# EAGLE board LCD-OLinuXino-15.6FHD (EAGLE 7.2.0)
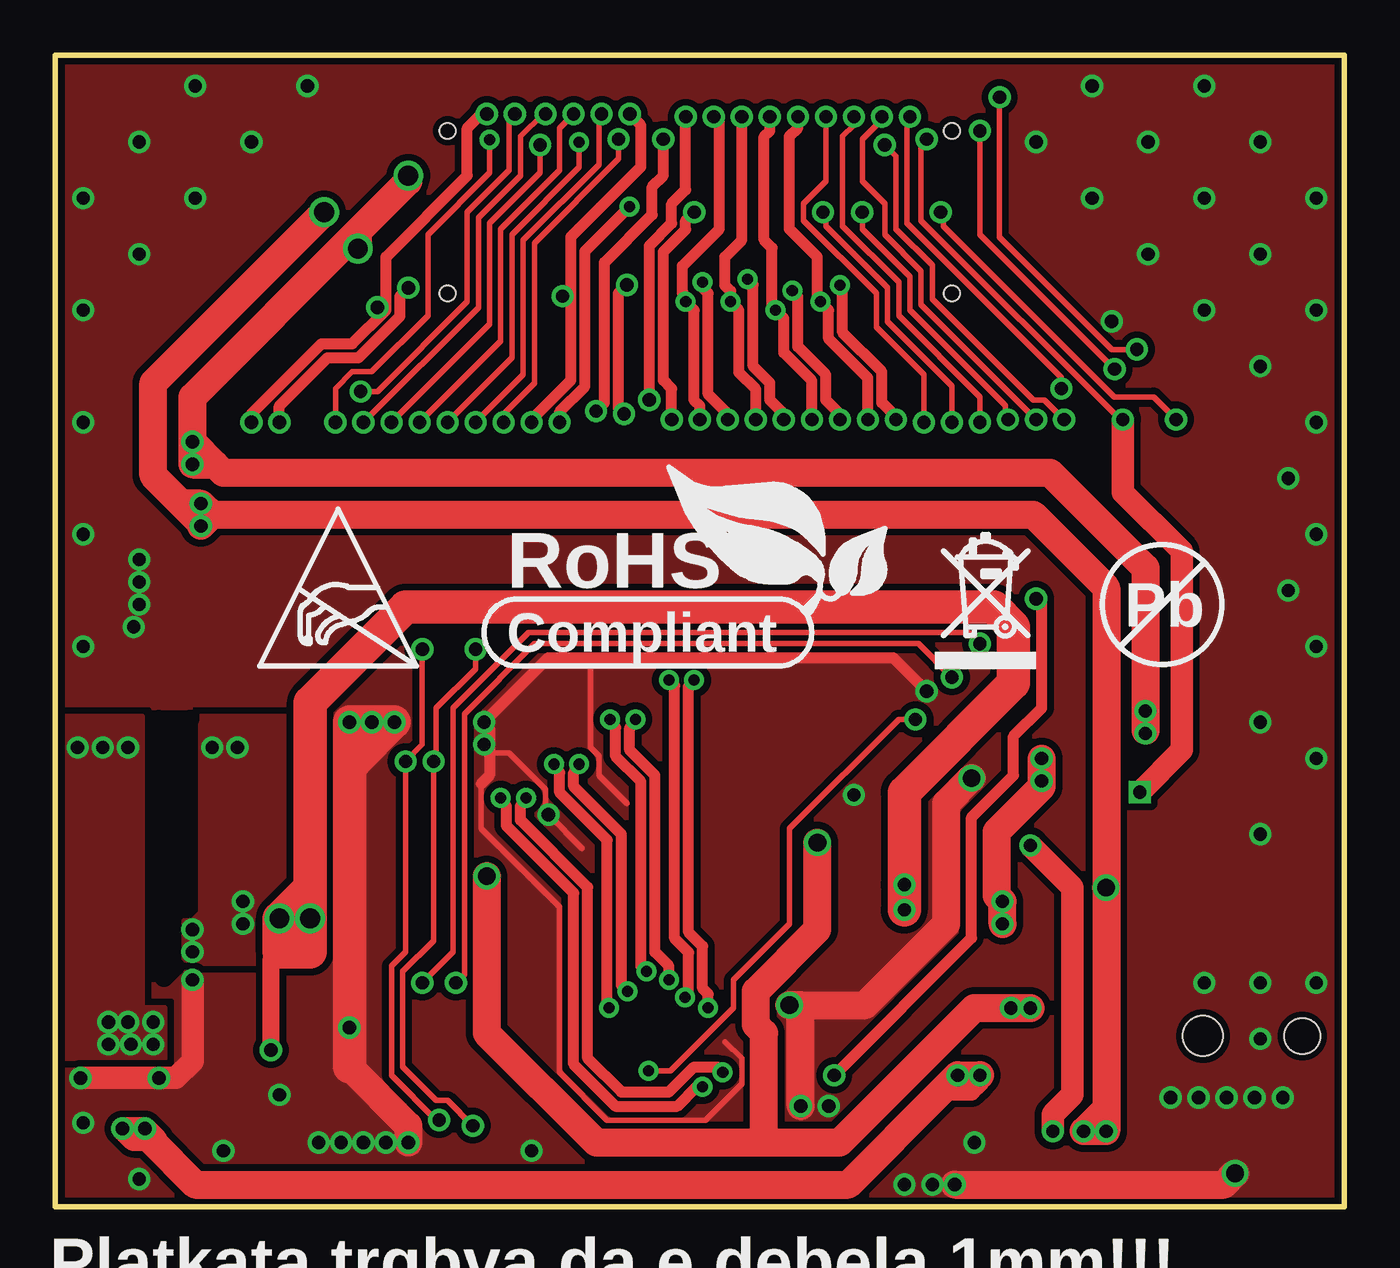
[diagram p0: board, top side]
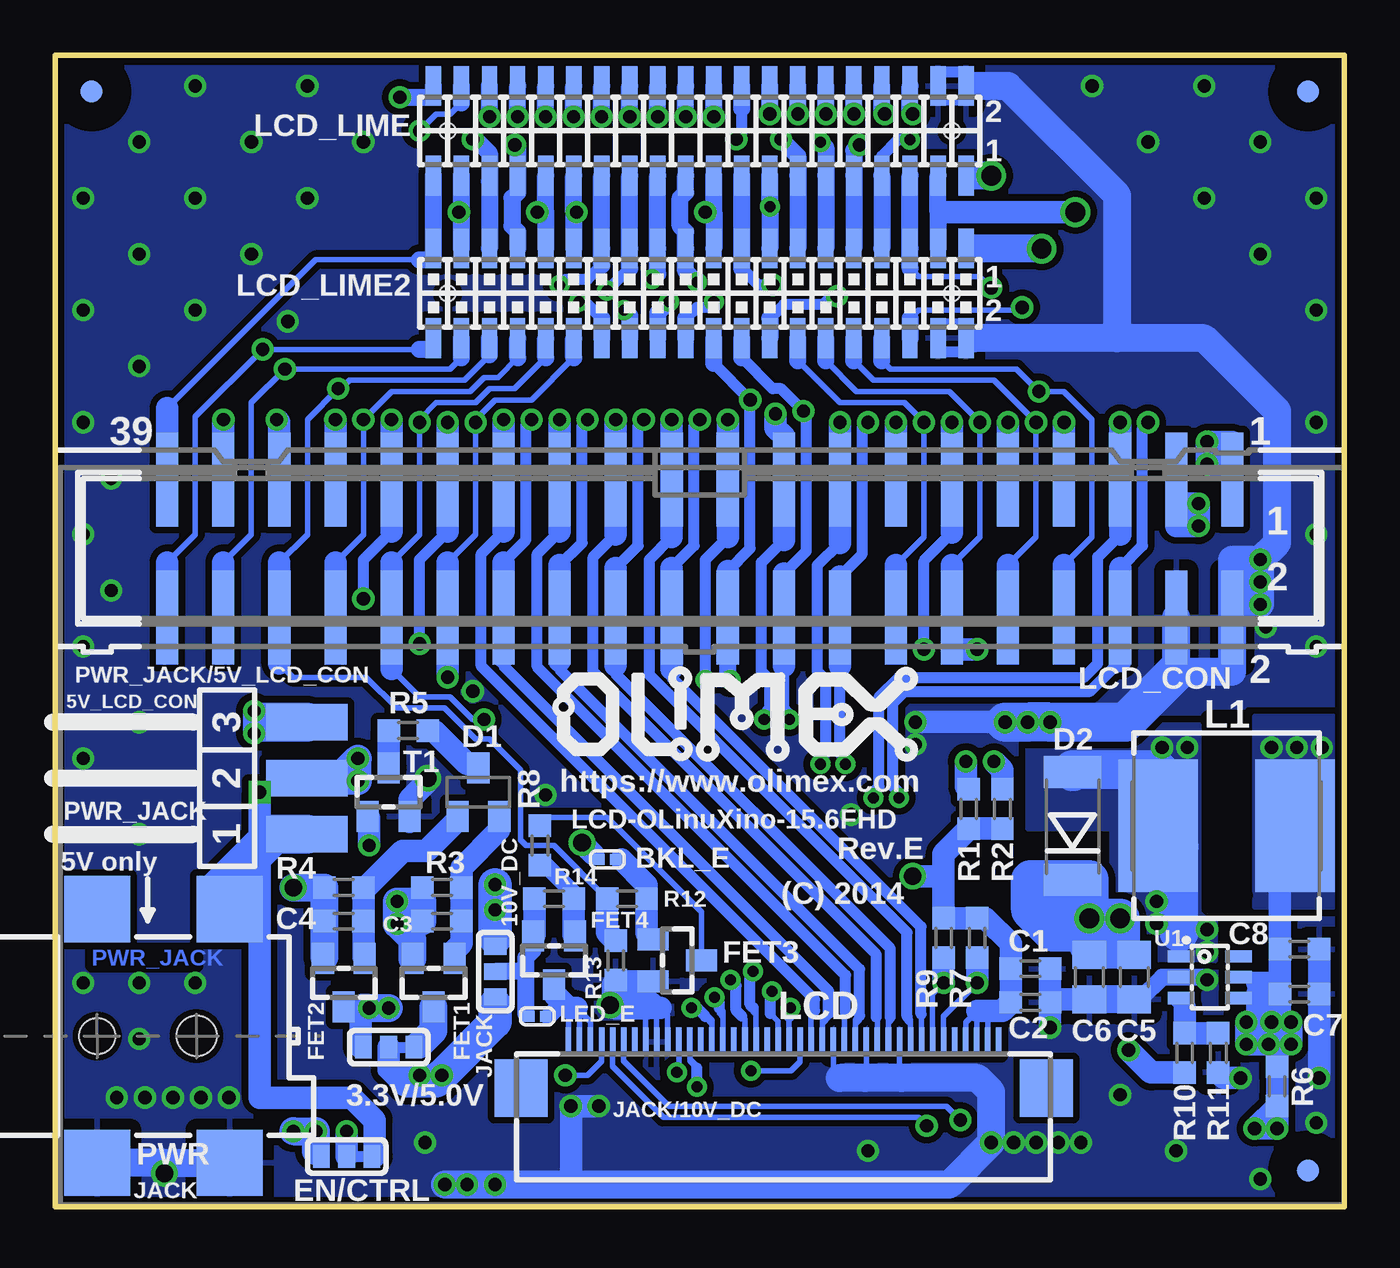
[diagram p1: board, bottom side, seen from below]

Size 58.42 x 52.2 mm. Coordinates in mm from the lower left corner, seen from the top.
Outline: 0,52.2 0,0 58.42,0 58.42,52.2 0,52.2
Copper layers (1+16): Top 0.035mm / dielectric 1mm / Bottom 0.035mm
Design rules "default": minimum track width 9.5mil, minimum drill 0.5mm, track to track 5mil, track to pad 5mil, pad to pad 5mil, via to via 5mil, smd to smd 1mil, copper to edge 10mil, drill to drill 8mil, minimum pad ring 8mil, minimum via ring 8mil, stop-mask expansion 4mil, vias tented up to drill 40mil, thermal gap 20mil
Net classes: 1 pwr: width 0.254 mm, drill 0.254 mm, clearance 0.241 mm
tRestrict: 3 lines
bRestrict: 2 lines

## Footprints (pad centres in the part's own frame; a part is rotated, then mirrored left to right if it is on the bottom)
SJ_2_SMALL_23_TIED = smd 0.762 x 1.016: 1 -1.143,0; 2 0,0; 3 1.143,0
SJ_1_THE_SMALLEST = smd 0.508 x 0.508: 1 -0.381,0; 2 0.381,0
C0603_DWS = smd 1.016 x 1.016: 1 -0.889,0; 2 0.889,0
C0805_5MIL_DWS = smd 1.27 x 1.524: 1 -1.016,0; 2 1.016,0
SOT23C = smd 1.4 x 1: 1 1.1,-0.95; 2 1.1,0.95; 3 -1.1,0
MELF-MLL41 = smd 1.45 x 2.6: 1 -2.445,0; 2 2.445,0
SOT23 = smd 1.4 x 1: 1 1.1,-0.95; 2 1.1,0.95; 3 -1.1,0
SJ_2_SMALL = smd 0.762 x 1.016: 1 -1.143,0; 2 0,0; 3 1.143,0
8X8MM_3131 = smd 3.6 x 6: 1 -3.1,0; 2 3.1,0
LCD_15.6'' = smd 0.25 x 1.3 bottom: 1 -67.54,31.89; 2 -67.04,31.89; 3 -66.54,31.89; 4 -66.04,31.89; 5 -65.54,31.89; 6 -65.04,31.89; 7 -64.54,31.89; 8 -64.04,31.89; 9 -63.54,31.89; 10 -63.04,31.89; 11 -62.54,31.89; 12 -62.04,31.89; 13 -61.54,31.89; 14 -61.04,31.89; 15 -60.54,31.89; 16 -60.04,31.89; 17 -59.54,31.89; 18 -59.04,31.89; 19 -58.54,31.89; 20 -58.04,31.89; 21 -57.54,31.89; 22 -57.04,31.89; 23 -56.54,31.89; 24 -56.04,31.89; 25 -55.54,31.89; 26 -55.04,31.89; 27 -54.54,31.89; 28 -54.04,31.89; 29 -53.54,31.89; 30 -53.04,31.89; 31 -52.54,31.89; 32 -52.04,31.89; 33 -51.54,31.89; 34 -51.04,31.89; 35 -50.54,31.89; 36 -50.04,31.89; 37 -49.54,31.89; 38 -49.04,31.89; 39 -48.54,31.89; 40 -48.04,31.89 | smd 2.4 x 2.6 bottom: P1 -69.69,29.79; P2 -45.89,29.79
ML40-MALE(GBH-254-SMT-40) = smd 1 x 4.25: 1 -24.13,-3.125; 2 -24.13,3.125; 3 -21.59,-3.125; 4 -21.59,3.125; 5 -19.05,-3.125; 6 -19.05,3.125; 7 -16.51,-3.125; 8 -16.51,3.125; 9 -13.97,-3.125; 10 -13.97,3.125; 11 -11.43,-3.125; 12 -11.43,3.125; 13 -8.89,-3.125; 14 -8.89,3.125; 15 -6.35,-3.125; 16 -6.35,3.125; 17 -3.81,-3.125; 18 -3.81,3.125; 19 -1.27,-3.125; 20 -1.27,3.125; 21 1.27,-3.125; 22 1.27,3.125; 23 3.81,-3.125; 24 3.81,3.125; 25 6.35,-3.125; 26 6.35,3.125; 27 8.89,-3.125; 28 8.89,3.125; 29 11.43,-3.125; 30 11.43,3.125; 31 13.97,-3.125; 32 13.97,3.125; 33 16.51,-3.125; 34 16.51,3.125; 35 19.05,-3.125; 36 19.05,3.125; 37 21.59,-3.125; 38 21.59,3.125; 39 24.13,-3.125; 40 24.13,3.125
YA-V36P-2X20-LF = smd 0.7 x 1.8: 1 -12.065,2.032; 2 -12.065,-2.032; 3 -10.795,2.032; 4 -10.795,-2.032; 5 -9.525,2.032; 6 -9.525,-2.032; 7 -8.255,2.032; 8 -8.255,-2.032; 9 -6.985,2.032; 10 -6.985,-2.032; 11 -5.715,2.032; 12 -5.715,-2.032; 13 -4.445,2.032; 14 -4.445,-2.032; 15 -3.175,2.032; 16 -3.175,-2.032; 17 -1.905,2.032; 18 -1.905,-2.032; 19 -0.635,2.032; 20 -0.635,-2.032; 21 0.635,2.032; 22 0.635,-2.032; 23 1.905,2.032; 24 1.905,-2.032; 25 3.175,2.032; 26 3.175,-2.032; 27 4.445,2.032; 28 4.445,-2.032; 29 5.715,2.032; 30 5.715,-2.032; 31 6.985,2.032; 32 6.985,-2.032; 33 8.255,2.032; 34 8.255,-2.032; 35 9.525,2.032; 36 9.525,-2.032; 37 10.795,2.032; 38 10.795,-2.032; 39 12.065,2.032; 40 12.065,-2.032 | hole 0.7: -11.43,0; 11.43,0
GPH127SMT-02X20(PA-V16X-2X20-LF) = smd 0.7 x 1.8: 1 -12.065,-2.032; 2 -12.065,2.032; 3 -10.795,-2.032; 4 -10.795,2.032; 5 -9.525,-2.032; 6 -9.525,2.032; 7 -8.255,-2.032; 8 -8.255,2.032; 9 -6.985,-2.032; 10 -6.985,2.032; 11 -5.715,-2.032; 12 -5.715,2.032; 13 -4.445,-2.032; 14 -4.445,2.032; 15 -3.175,-2.032; 16 -3.175,2.032; 17 -1.905,-2.032; 18 -1.905,2.032; 19 -0.635,-2.032; 20 -0.635,2.032; 21 0.635,-2.032; 22 0.635,2.032; 23 1.905,-2.032; 24 1.905,2.032; 25 3.175,-2.032; 26 3.175,2.032; 27 4.445,-2.032; 28 4.445,2.032; 29 5.715,-2.032; 30 5.715,2.032; 31 6.985,-2.032; 32 6.985,2.032; 33 8.255,-2.032; 34 8.255,2.032; 35 9.525,-2.032; 36 9.525,2.032; 37 10.795,-2.032; 38 10.795,2.032; 39 12.065,-2.032; 40 12.065,2.032 | hole 0.7: -11.43,0; 11.43,0
PWR-JACK-SMD = smd 3 x 3: 1 6,5.75; 2 0,-5.75; 3 6,-5.75; 4 0,5.75 | hole 1.6: 0,0 | hole 1.8: 4.5,0
HN1X3-SMD = smd 1.651 x 3.683: 1 -2.54,-0.229; 2 0,-0.229; 3 2.54,-0.229
R0603_5MIL_DWS = smd 1.016 x 1.016: 1 -0.889,0; 2 0.889,0
0603_0R = smd 1.016 x 1.016: 1 -0.889,0; 2 0.889,0
SOT-23 = smd 1.4 x 1: 1 1.1,-0.95; 2 1.1,0.95; 3 -1.1,0
SOT23-6 = smd 1.2 x 0.55: 1 1.3,-0.95; 2 1.3,0; 3 1.3,0.95; 4 -1.3,0.95; 5 -1.3,0; 6 -1.3,-0.95
FIDUCIAL-1X3 = smd 1 x 1: 1 0,0

## Placement (x,y rotation side)
3.3V/5.0V  3.3V:Open/5.0V:Close  [SJ_2_SMALL_23_TIED]  43.31,7.24 0 bottom
BKL_E  open  [SJ_1_THE_SMALLEST]  33.4,15.75 180 bottom
C1  22uF/6.3V  [C0603_DWS]  14.22,10.79 0 bottom
C2  22uF/6.3V  [C0603_DWS]  14.22,9.27 0 bottom
C3  22uF/6.3V  [C0603_DWS]  40.89,12.95 0 bottom
C4  NA  [C0603_DWS]  45.34,12.95 0 bottom
C5  10uF/16V  [C0805_5MIL_DWS]  9.53,10.41 270 bottom
C6  10uF/16V  [C0805_5MIL_DWS]  11.56,10.41 270 bottom
C7  22uF/6.3V  [C0603_DWS]  2.03,9.65 0 bottom
C8  22uF/6.3V  [C0603_DWS]  2.03,11.68 0 bottom
D1  BAT54C  [SOT23C]  39.24,18.8 270 bottom
D2  1N5822/SS34/SMA  [MELF-MLL41]  12.32,17.27 90 bottom
EN/CTRL  EN:Open/CTRL:Close  [SJ_2_SMALL_23_TIED]  45.21,2.29 0 bottom
FET1  IRLML6402  [SOT23]  41.27,10.16 90 bottom
FET2  IRLML6402  [SOT23]  45.34,10.16 90 bottom
FET3  BSS138  [SOT23]  30.23,11.18 180 bottom
FET4  IRLML6402  [SOT23]  35.81,11.18 90 bottom
JACK/10V_DC  PWR_JACK:Open/10V_DCDC:Close  [SJ_2_SMALL]  38.48,10.67 90 bottom
L1  2.2uH/3A/YS75/7x8  [8X8MM_3131]  5.33,17.27 0 bottom
LCD  LCD15.6''(B156XW04_V5)FPV-WZA21-40-LF  [LCD_15.6'']  83.2,-24.4 0 top
LCD_CON  ML40-GBH-254-SMT-40  [ML40-MALE(GBH-254-SMT-40)]  29.21,29.84 180 bottom
LCD_LIME  ML40-GPH127SMT-02X20  [YA-V36P-2X20-LF]  29.21,48.77 180 bottom
LCD_LIME2  ML40-GPH127SMT-02X20  [GPH127SMT-02X20(PA-V16X-2X20-LF)]  29.21,41.4 180 bottom
LED_E  open  [SJ_1_THE_SMALLEST]  36.58,8.64 0 bottom
PWR_JACK  DCJ-W54R-20-LF  [PWR-JACK-SMD]  56.52,7.75 0 bottom
PWR_JACK/5V_LCD_CON  H-WX-1x3  [HN1X3-SMD]  47.24,19.43 90 bottom
R1  10k  [R0603_5MIL_DWS]  17.02,18.03 270 bottom
R2  10k  [R0603_5MIL_DWS]  15.49,18.03 90 bottom
R3  18.2k/1%  [R0603_5MIL_DWS]  40.89,14.48 180 bottom
R4  10k  [R0603_5MIL_DWS]  45.34,14.48 180 bottom
R5  1.1k/1%  [R0603_5MIL_DWS]  42.42,21.59 0 bottom
R6  0R(board_munted)  [0603_0R]  3.05,5.46 270 bottom
R7  NA(4.7k)  [R0603_5MIL_DWS]  16.64,12.19 270 bottom
R8  560R  [R0603_5MIL_DWS]  36.45,16.38 90 bottom
R9  NA(4.7k)  [R0603_5MIL_DWS]  18.16,12.19 270 bottom
R10  18.2k/1%  [R0603_5MIL_DWS]  7.24,6.99 270 bottom
R11  1.1k/1%  [R0603_5MIL_DWS]  5.71,6.99 270 bottom
R12  560R  [R0603_5MIL_DWS]  32.51,13.97 0 bottom
R13  10k  [R0603_5MIL_DWS]  33.02,11.18 90 bottom
R14  1.1k/1%  [R0603_5MIL_DWS]  35.81,13.97 0 bottom
T1  DTC114YKA  [SOT-23]  43.31,18.8 270 bottom
U1  SY7208(SOT23-6)  [SOT23-6]  6.1,10.41 180 bottom
U$1  FIDUCIAL  [FIDUCIAL-1X3]  56.77,50.55 270 bottom
U$2  FIDUCIAL  [FIDUCIAL-1X3]  1.65,1.65 270 bottom
U$3  FIDUCIAL  [FIDUCIAL-1X3]  1.65,50.55 270 bottom
U$5  [ROHS]  20.45,25.15 0 top
U$6  [PB]  50.16,27.3 0 top
U$8  [OLIMEX1_V]  18.16,20.07 0 bottom
U$10  [ESD_SYMBOL]  9.27,24.51 0 top
U$11  [RECYCLE_BIN1/8]  39.88,24.38 0 top

## Library data of the parts
3.3V/5.0V BKL_E EN/CTRL JACK/10V_DC LED_E PWR_JACK/5V_LCD_CON = jumper
C1-C8 R1-R5 R7-R14 = rcl
D1 D2 = semicon-smd-ipc
FET1-FET4 = Penko
L1 R6 T1 = OLIMEX_DISCRET
LCD = olimex_lcd
LCD_CON LCD_LIME LCD_LIME2 = con-harting-ml
PWR_JACK = gogo
U1 = OLIMEX_IC
U$1-U$3 = SparkFunEagle-6-6-07
U$5 U$6 U$8 U$10 U$11 = olimex_logo1

## Nets
3.3VDC [pwr]: C4.1 EN/CTRL.1 FET2.2 LCD_CON.3 LCD_LIME2.3 LCD_LIME.3 R4.2
5VDC: C3.1 FET1.2 PWR_JACK/5V_LCD_CON.2 R3.2
+5V: 3.3V/5.0V.2 JACK/10V_DC.1 R6.2
+12V [pwr]: C5.1 C6.1 D2.1 JACK/10V_DC.3 R10.2
CLK_EDID: LCD.6 LCD_CON.29 LCD_LIME2.29 LCD_LIME.29 R7.2
DAT_EDID: LCD.7 LCD_CON.30 LCD_LIME2.30 LCD_LIME.30 R9.2
DCR_EN: LCD.37 LCD_CON.31 LCD_LIME2.31 LCD_LIME.31
GND [pwr]: C1.2 C2.2 C5.2 C6.2 C7.2 C8.2 FET3.2 LCD.10 LCD.13 LCD.16 LCD.31 LCD.32 LCD.33 LCD_CON.2 LCD_CON.4 LCD_LIME2.2 LCD_LIME2.4 LCD_LIME.2 LCD_LIME.4 PWR_JACK.2 PWR_JACK.3 R11.2 R13.1 T1.2 U1.2
IMG_EN: LCD.19 LCD_CON.32 LCD_LIME2.32 LCD_LIME.32
LCD_BKL: LCD_CON.36 LCD_LIME2.36 LCD_LIME.36 R12.1 R13.2
LCD_PWRE: EN/CTRL.3 LCD_CON.35 LCD_LIME2.35 LCD_LIME.35
LVDS0_VN0: LCD.8 LCD_CON.22 LCD_LIME2.22 LCD_LIME.22
LVDS0_VN1: LCD.11 LCD_CON.24 LCD_LIME2.24 LCD_LIME.24
LVDS0_VN2: LCD.14 LCD_CON.26 LCD_LIME2.26 LCD_LIME.26
LVDS0_VNC: LCD.17 LCD_CON.28 LCD_LIME2.28 LCD_LIME.28
LVDS0_VP0: LCD.9 LCD_CON.21 LCD_LIME2.21 LCD_LIME.21
LVDS0_VP1: LCD.12 LCD_CON.23 LCD_LIME2.23 LCD_LIME.23
LVDS0_VP2: LCD.15 LCD_CON.25 LCD_LIME2.25 LCD_LIME.25
LVDS0_VPC: LCD.18 LCD_CON.27 LCD_LIME2.27 LCD_LIME.27
N$1: 3.3V/5.0V.3 FET1.3
N$2 [pwr]: FET4.2 JACK/10V_DC.2 LED_E.1 R14.1
N$3 [pwr]: FET4.3 LCD.38 LCD.39 LCD.40 LED_E.2
N$4: BKL_E.1 FET3.1 R12.2
N$5: LCD_CON.7 LCD_LIME2.7 LCD_LIME.7
N$6: LCD_CON.9 LCD_LIME2.9 LCD_LIME.9
N$7: LCD_CON.13 LCD_LIME2.13 LCD_LIME.13
N$8: C4.2 D1.1 FET2.1 R4.1
N$9: C3.2 D1.2 FET1.1 R3.1
N$10: LCD_CON.33 LCD_LIME2.33 LCD_LIME.33
N$11: R5.1 T1.3
N$12: LCD_CON.37 LCD_LIME2.37 LCD_LIME.37
N$13: LCD_CON.39 LCD_LIME2.39 LCD_LIME.39
N$14: LCD_CON.8 LCD_LIME2.8 LCD_LIME.8
N$15: LCD_CON.10 LCD_LIME2.10 LCD_LIME.10
N$16: EN/CTRL.2 T1.1
N$17: LCD_CON.14 LCD_LIME2.14 LCD_LIME.14
N$18: LCD_CON.34 LCD_LIME2.34 LCD_LIME.34
N$19: D1.3 R5.2
N$20: LCD_CON.1 LCD_LIME2.1 LCD_LIME.1 PWR_JACK/5V_LCD_CON.3
N$21: LCD_CON.38 LCD_LIME2.38 LCD_LIME.38
N$22 [pwr]: PWR_JACK.1 PWR_JACK/5V_LCD_CON.1
N$23: LCD_CON.40 LCD_LIME2.40 LCD_LIME.40
N$24: C7.1 C8.1 L1.2 R6.1 U1.4 U1.5
N$25: FET4.1 R8.1 R14.2
N$26: FET3.3 R8.2
N$123: D2.2 L1.1 U1.1
N$126: R10.1 R11.1 U1.3
RXE0+: LCD.21 LCD_CON.15 LCD_LIME2.15 LCD_LIME.15
RXE0-: LCD.20 LCD_CON.16 LCD_LIME2.16 LCD_LIME.16
RXE1+: LCD.24 LCD_CON.17 LCD_LIME2.17 LCD_LIME.17
RXE1-: LCD.23 LCD_CON.18 LCD_LIME2.18 LCD_LIME.18
RXE2+: LCD.27 LCD_CON.19 LCD_LIME2.19 LCD_LIME.19
RXE2-: LCD.26 LCD_CON.20 LCD_LIME2.20 LCD_LIME.20
RXEC+: LCD.30 LCD_CON.5 LCD_LIME2.5 LCD_LIME.5
RXEC-: LCD.29 LCD_CON.6 LCD_LIME2.6 LCD_LIME.6
VCC [pwr]: 3.3V/5.0V.1 BKL_E.2 C1.1 C2.1 FET2.3 LCD.2 LCD.3 LCD.4 R1.2 R2.1 R7.1 R9.1
VLED_EN: LCD.36 LCD_CON.11 LCD_LIME2.11 LCD_LIME.11 R1.1
VPWM_EN: LCD.35 LCD_CON.12 LCD_LIME2.12 LCD_LIME.12 R2.2

## Tracks (layer width: path | path; a pad name or v marks a point on that pad's centre or on a via)
3.3VDC  (via drill 0.6, 0.8, 0.9)
  Top 1.27: 7.11,31.37 v6.6,31.88 | v6.6,30.86 7.11,31.37 | v6.6,30.86 v6.6,31.88 | 7.11,31.37 44.32,31.37 47.62,28.07 v47.62,14.48 47.62,4.45 | 47.62,4.45 v47.62,3.43 v46.61,3.43 47.62,4.45 | v6.6,31.88 5.71,31.88 | 5.71,31.88 4.45,33.15 4.45,37.34 v12.19,45.09 | v6.6,30.86 6.6,30.99 5.71,31.88
  Bottom 0.508: 18.16,45.09 18.41,45.09
  Bottom 0.762: 46.61,2.54 EN/CTRL.1 | LCD_LIME2.3 18.41,45.09 LCD_LIME.3
  Bottom 1.016: 7.62,31.88 LCD_CON.3 | 7.62,31.88 v6.6,31.88 v6.6,30.86 7.62,30.86 7.62,31.88 | 46.23,11.32 FET2.2 | v12.19,45.09 18.16,45.09
  Bottom 1.27: 46.23,11.32 C4.1 R4.2 v47.62,14.48 | 46.61,2.54 v46.61,3.43 v47.62,3.43
5VDC  (via drill 0.6)
  Top 1.27: v44.7,20.32 v44.7,19.3 44.7,19.05 42.67,17.02 42.67,14.1 v42.93,13.84 v42.93,12.83
  Bottom 1.016: 41.78,13.84 R3.2
  Bottom 1.27: 45.72,19.3 v44.7,19.3 v44.7,20.32 45.72,19.3 | 45.72,19.3 46.89,19.3 PWR_JACK/5V_LCD_CON.2 | FET1.2 42.23,11.81 42.23,12.13 v42.93,12.83 v42.93,13.84 41.78,13.84 C3.1
+5V  (via drill 0.6)
  Top 0.762: v41.91,5.97 41.91,5.59 41.53,5.21 40.13,5.21
  Top 1.016: v4.06,3.56 4.57,3.05 4.32,3.05 3.56,3.05 v3.05,3.56 v4.06,3.56
  Top 1.27: v41.91,5.97 v40.89,5.97 40.13,5.21 35.94,1.02 6.35,1.02 4.32,3.05
  Bottom 0.508: 38.48,9.14 JACK/10V_DC.1 | v41.91,5.97 41.91,5.71
  Bottom 0.762: 42.55,5.71 42.95,5.71 43.43,6.2 43.43,7.11 3.3V/5.0V.2
  Bottom 1.016: 42.42,5.71 42.55,5.71 42.67,5.71 43.31,6.35 3.3V/5.0V.2 | R6.2 v3.05,3.56 v4.06,3.56 R6.2
  Bottom 1.524: 38.48,9.14 38.48,8.38 v40.89,5.97 41.15,5.71 41.91,5.71 42.42,5.71
+12V  (via drill 0.6, 0.9)
  Top 0.762: v9.78,7.11 9.78,11.18 10.16,11.56
  Top 1.524: v11.56,13.08 11.56,14.48 | v10.16,13.08 v11.56,13.08 | v10.16,13.08 11.56,14.48 | 11.56,14.48 11.56,22.86 15.88,27.18 42.55,27.18 43.43,26.29 43.43,23.75 38.48,18.8 v38.48,14.61 v38.48,13.46 | v11.56,13.08 11.56,11.56 10.16,11.56 v10.16,13.08
  Bottom 0.508: 38.48,12.19 JACK/10V_DC.3
  Bottom 1.016: R10.2 8.76,6.1 v9.78,7.11
  Bottom 1.27: 10.16,11.43 C5.1 | 10.16,11.43 C6.1 11.56,11.81 | 10.16,12.06 10.16,11.43
  Bottom 1.524: 38.48,12.19 v38.48,13.46 v38.48,14.61
  Bottom 1.778: 11.56,12.45 11.56,11.81 | v11.56,13.08 11.56,12.45 | v11.56,13.08 v10.16,13.08 10.16,12.06 | v11.56,13.08 11.56,14.83 D2.1 13.21,14.83 | 13.21,12.45 13.21,14.83 | 11.56,12.45 13.21,12.45 | 13.21,12.45 14.22,13.46 14.22,14.83 13.21,14.83
CLK_EDID  (via drill 0.6)
  Top 0.254: v16.64,10.16 18.03,11.56 18.03,22.61 21.46,26.04 41.4,26.04 v41.91,25.53 | v40.64,35.56 40.64,37.21 37.72,40.13 37.72,41.66 34.92,44.45 34.92,44.96 v34.8,45.09
  Bottom 0.254: LCD.6 18.16,8.64 v16.64,10.16
  Bottom 0.508: v41.91,25.53 41.91,29.34 40.64,30.61
  Bottom 0.762: 34.92,45.09 LCD_LIME2.29 | v34.8,45.09 34.92,45.09 | 34.92,45.09 LCD_LIME.29
  Bottom 1.016: 40.64,30.61 LCD_CON.29 v40.64,35.56 | v16.64,10.16 R7.2
DAT_EDID  (via drill 0.6)
  Top 0.254: v18.16,10.16 18.54,10.54 18.54,22.35 21.72,25.53 39.12,25.53 v40.64,24 | v39.37,35.56 39.37,37.72 37.21,39.88 37.21,41.4 33.91,44.7 33.91,45.47 34.92,46.48 v34.92,49.4
  Bottom 0.254: LCD.7 18.66,9.66 v18.16,10.16 | 40.64,29.21 39.37,30.48 v39.37,35.56 39.37,35.69 38.48,36.58 36.83,36.58 34.92,38.48
  Bottom 0.762: 34.92,38.48 LCD_LIME2.30 | v34.92,49.4 LCD_LIME.30
  Bottom 1.016: v40.64,24 LCD_CON.30 40.64,29.21 | v18.16,10.16 R9.2
DCR_EN  (via drill 0.6)
  Top 0.254: v43.18,35.69 43.05,35.81 43.05,36.32 38.73,40.64 38.73,42.16 36.58,44.32 v36.58,45.09
  Top 0.508: v35.31,5.97 41.53,12.19 41.53,17.65 43.43,19.56 43.43,21.34 44.7,22.61 44.7,27.3 v44.45,27.56
  Bottom 0.254: LCD.37 33.66,6.6 34.29,5.97 v35.31,5.97
  Bottom 0.508: v44.45,27.56 44.45,29.34 43.18,30.61
  Bottom 0.762: 36.2,45.09 LCD_LIME2.31 | 36.2,45.09 LCD_LIME.31 | v36.58,45.09 36.2,45.09
  Bottom 1.016: 43.18,30.61 LCD_CON.31 v43.18,35.69
GND  (via drill 0.6, 0.8)
  Top 0.254: 19.3,19.18 19.3,17.14 22.86,13.59 22.86,6.1 25.02,3.94 29.46,3.94 31.11,5.59 31.11,6.73 30.35,7.49 | 24.26,24.89 24.26,20.83 24.64,20.45 24.64,19.56 25.91,18.29 | 19.68,20.57 20.57,20.57 22.23,18.92 22.23,17.91 v22.35,17.78 23.88,16.26
  Top 0.508: 19.3,19.18 19.68,19.56 19.68,20.57 19.68,21.72 v19.43,21.97 22.35,24.89 24.26,24.89 37.97,24.89 v39.5,23.37
  Top 1.016: v6.22,10.29 6.22,6.6 5.46,5.84 v4.7,5.84 v1.14,5.84
  Top 1.27: 13.34,6.35 16,3.68 v16,2.92 | v41.53,19.43 40.39,18.29 40.39,12.83 36.7,9.14 33.78,9.14 | 33.78,9.14 v33.27,9.14 | v40.77,1.02 52.96,1.02 v53.47,1.52 | v33.78,4.57 33.78,9.14
  Top 1.524: 13.34,6.35 v13.34,8.13 13.34,20.19 | 13.34,20.19 v13.34,21.97 v14.35,21.97 v15.37,21.97 13.59,20.19 13.34,20.19
  Bottom 0.254: 20.07,5.84 20.07,5.97 20.16,6.06 LCD.10 | LCD.13 21.66,5.9 21.72,5.84 | LCD.16 23.16,6.14 22.86,5.84 | LCD.32 31.16,8.85 30.99,9.02 30.66,8.69 LCD.31 | LCD.33 31.66,8.73 31.37,9.02
  Bottom 0.508: LCD_LIME2.2 17.14,38.73 18.41,38.73 LCD_LIME2.4 18.41,40.01 17.14,40.01 LCD_LIME2.2 | 16.76,39.37 LCD_LIME2.2 | LCD_LIME.2 17.14,51.44 18.41,51.44 LCD_LIME.4 18.41,50.16 17.14,50.16 LCD_LIME.2 | 16.76,50.8 LCD_LIME.2
  Bottom 0.762: C5.2 9.27,9.4 8.26,10.41 U1.2 6.35,10.41 v6.22,10.29
  Bottom 1.016: 42.36,17.46 T1.2 42.36,18.48 41.53,19.3 v41.53,19.43 | v53.47,1.52 53.47,2 | v33.78,4.57 v35.05,4.57 35.05,1.02 | v13.34,8.13 C2.2 13.34,9.4 | C8.2 C7.2 v1.14,5.84 | 13.34,9.4 C1.2 | C6.2 13.34,9.4 | v15.37,21.97 v19.43,21.97 | v4.7,5.84 5.46,5.84 R11.2 | v33.27,9.14 33.15,9.14 33.15,10.1 33.02,10.23 | 33.02,10.23 R13.1 | 33.02,10.23 FET3.2 | 30.99,9.02 31.37,9.02 31.5,9.14
  Bottom 1.27: PWR_JACK.3 53.47,2 PWR_JACK.2 | v40.77,1.02 35.05,1.02 17.91,1.02 v16,2.92 16,5.21 16.64,5.84 20.07,5.84 21.72,5.84 22.86,5.84 | LCD_CON.4 7.62,24.26 5.08,24.26 LCD_CON.2 5.08,27.3 | C5.2 C6.2 | 16.76,50.8 15.24,50.8 10.29,45.85 10.29,39.37 | 10.29,39.37 16.76,39.37 | 10.29,39.37 6.35,39.37 3.05,36.07 3.05,30.1 v3.81,29.34 | 5.08,27.3 5.08,29.34 v3.81,29.34 | v3.81,29.34 v3.81,27.3 5.08,27.3 | 33.15,9.14 31.5,9.14
  Bottom 1.778: 7.62,24.26 9.91,21.97 v13.34,21.97 v14.35,21.97 v15.37,21.97
  other vias: 50.55,4.95 51.82,4.95 53.09,4.95 54.36,4.95 55.63,4.95 39.75,1.02 41.66,2.92 14.99,2.92 13.97,2.92 12.95,2.92 3.81,28.32 38.48,1.02 11.94,2.92 19.43,20.95 36.2,18.67 47.88,40.13 3.56,26.29 6.35,50.8 11.43,50.8 8.89,48.26 6.35,45.72 3.81,48.26 1.27,45.72 3.81,43.18 1.27,40.64 1.27,35.56 1.27,30.48 1.27,25.4 1.27,3.81 3.81,1.27 7.62,2.54 10.16,5.08 21.59,2.54 54.61,7.62 52.07,10.16 54.61,10.16 57.15,10.16 54.61,16.89 57.15,20.32 54.61,21.97 57.15,25.4 55.88,27.94 57.15,30.48 55.88,33.02 57.15,35.56 54.61,38.1 52.07,40.64 49.53,43.18 46.99,45.72 44.45,48.26 46.99,50.8 49.53,48.26 52.07,45.72 54.61,43.18 57.15,40.64 57.15,45.72 54.61,48.26 52.07,50.8
  pour Top (isolate 0.305, rank 2): 68.45,60.96 68.45,-5.08 -5.08,-5.08 -5.08,60.96
  pour Bottom (isolate 0.305, rank 3): -2.54,-2.54 64.26,-2.54 64.26,58.42 -2.54,58.42
IMG_EN  (via drill 0.5, 0.6)
  Top 0.254: v26.9,6.17 27.89,6.17 30.73,9.02 30.73,10.29 33.27,12.83 33.27,17.14 38.23,22.1 v38.99,22.1 | v41.91,35.56 41.91,36.7 38.23,40.39 38.23,41.91 35.69,44.45 35.69,48.51 36.2,49.02 v36.2,49.4
  Bottom 0.254: LCD.19 24.66,6.58 25.07,6.17 v26.9,6.17 | 43.18,24.38 41.91,23.11 40.51,23.11 39.5,22.1 v38.99,22.1 | 43.18,29.21 41.91,30.48 v41.91,35.56 41.91,35.69 41.15,36.45 39.37,36.45 38.73,37.08 37.59,37.08 36.2,38.48
  Bottom 0.762: 36.2,38.48 LCD_LIME2.32 | v36.2,49.4 LCD_LIME.32
  Bottom 1.016: 43.18,24.38 LCD_CON.32 43.18,29.21
LCD_BKL  (via drill 0.6)
  Top 0.254: v45.59,37.08 45.59,37.59 38.61,44.58 38.61,49.28 v38.73,49.4
  Bottom 0.254: 48.26,24.64 47.62,24 44.32,24 42.93,22.61 40.77,22.61 39.37,21.21 38.73,21.21 37.34,19.81 37.34,16.64 37.08,16.38 35.81,16.38 R12.1 | 48.26,29.21 46.99,30.48 46.99,35.69 v45.59,37.08 45.47,37.08 45.09,37.47 39.88,37.47 38.73,38.61
  Bottom 0.762: v38.73,49.4 LCD_LIME.36 | 38.73,38.61 LCD_LIME2.36
  Bottom 1.016: 48.26,24.64 LCD_CON.36 48.26,29.21 | R13.2 33.4,12.45 R12.1
LCD_PWRE  (via drill 0.6)
  Top 0.254: v48.39,35.69 48.26,35.69 39.24,44.7 39.24,48.13 v39.5,48.39
  Top 1.016: v49.15,18.8 51.05,20.7 51.05,29.72 48.39,32.38 v48.39,35.69
  Bottom 0.508: 38.73,46.48 LCD_LIME.35
  Bottom 0.762: EN/CTRL.3 43.94,2.29 | LCD_LIME2.35 38.73,46.48 38.73,47.75 39.37,48.39 v39.5,48.39
  Bottom 1.016: 43.94,2.29 43.94,3.94 44.96,4.95 49.15,4.95 v49.15,18.8 | v48.39,35.69 48.26,35.56 LCD_CON.35
LVDS0_VN0  (via drill 0.5, 0.6)
  Top 0.508: v29.21,35.69 29.21,36.3 28.96,36.55 28.96,40.64 v28.57,41.02 28.57,41.27 28.42,41.43 28.42,42.65 30.1,44.32 30.1,49.15 v29.84,49.4
  Bottom 0.254: LCD.8 19.16,8.72 19.18,8.74
  Bottom 0.508: 30.48,24.38 30.48,24 19.18,12.7 19.18,8.74 | 30.48,28.96 29.46,29.97 29.46,35.43 v29.21,35.69 | v28.57,41.02 28.83,40.77 29.34,40.77 29.84,40.26
  Bottom 0.762: 29.84,40.26 LCD_LIME2.22 | v29.84,49.4 LCD_LIME.22
  Bottom 1.016: 30.48,24.38 LCD_CON.22 30.48,28.96
LVDS0_VN1  (via drill 0.5, 0.6)
  Top 0.508: v31.75,35.69 31.75,37.06 30.99,37.82 30.99,40.64 v30.61,41.02 30.61,41.5 30.35,41.76 30.35,43.05 31.11,43.81 v31.11,49.4
  Bottom 0.254: LCD.11 20.66,8.34 | 20.66,8.34 20.66,8.53 20.57,8.61 20.57,8.42 20.66,8.34
  Bottom 0.508: 20.57,8.61 20.57,11.71 33.02,24.16 33.02,24.54 | 33.02,28.96 32,29.97 32,35.43 v31.75,35.69
  Bottom 0.762: v30.61,41.02 31.11,40.51 LCD_LIME2.24 | v31.11,49.4 LCD_LIME.24
  Bottom 1.016: 33.02,24.54 LCD_CON.24 33.02,28.96
LVDS0_VN2  (via drill 0.5, 0.6)
  Top 0.508: v34.29,35.69 34.29,37.44 33.02,38.71 33.02,40.26 v32.64,40.64 32.49,40.79 32.49,43.46 32.13,43.81 32.13,48.51 32.38,48.77 v32.38,49.4
  Bottom 0.254: LCD.14 22.16,8.29 | 22.16,8.29 22.16,8.47 21.97,8.66 21.97,8.48 22.16,8.29
  Bottom 0.508: 35.56,24.74 35.56,24.36 21.97,10.77 21.97,8.66 | 35.56,29.08 34.54,30.1 34.54,35.43 v34.29,35.69
  Bottom 0.762: v32.64,40.64 32.38,40.39 LCD_LIME2.26 | v32.38,49.4 LCD_LIME.26
  Bottom 1.016: 35.56,24.74 LCD_CON.26 35.56,29.08
LVDS0_VNC  (via drill 0.5, 0.6)
  Top 0.508: v36.83,35.69 36.83,37.57 35.05,39.34 35.05,40.64 v34.67,41.02 34.54,41.15 34.54,43.05 33.27,44.32 33.27,48.51 33.66,48.9 v33.66,49.4
  Bottom 0.254: LCD.17 23.66,8.35 | 23.66,8.35 23.66,8.47 23.37,8.76 23.37,8.59 23.61,8.35 23.66,8.35
  Bottom 0.508: 38.1,24.92 38.1,24.52 23.37,9.79 23.37,8.76 | 38.1,29.21 37.08,30.23 37.08,35.43 v36.83,35.69 | v34.67,41.02 34.42,41.02 33.66,40.26
  Bottom 0.762: 33.66,40.26 LCD_LIME2.28 | v33.66,49.4 LCD_LIME.28
  Bottom 1.016: 38.1,24.92 LCD_CON.28 38.1,29.21
LVDS0_VP0  (via drill 0.5, 0.6)
  Top 0.508: v30.48,35.69 30.48,35.94 29.59,36.83 29.59,41.4 29.34,41.66 v29.34,41.91
  Bottom 0.254: LCD.9 19.66,8.31 | 19.66,8.31 19.66,8.48 19.81,8.64 19.81,8.46 19.66,8.31
  Bottom 0.508: 30.48,30.35 31.5,29.34 31.5,24.12 19.81,12.43 19.81,8.64
  Bottom 0.762: LCD_LIME.21 29.84,45.97 30.1,45.72 30.1,44.45 29.84,44.2 LCD_LIME2.21 29.84,42.42 v29.34,41.91
  Bottom 1.016: 30.48,30.35 LCD_CON.21 v30.48,35.69
LVDS0_VP1  (via drill 0.5, 0.6)
  Top 0.508: v33.02,35.69 33.02,35.94 32.38,36.58 32.38,37.34 31.62,38.1 31.62,41.78 v31.37,42.04
  Bottom 0.254: LCD.12 21.16,8.56 21.21,8.61
  Bottom 0.508: 33.02,30.48 34.04,29.46 34.04,24.27 21.21,11.44 21.21,8.61
  Bottom 0.762: LCD_LIME.23 LCD_LIME2.23 31.11,42.29 v31.37,42.04
  Bottom 1.016: 33.02,30.48 LCD_CON.23 v33.02,35.69
LVDS0_VP2  (via drill 0.5, 0.6)
  Top 0.508: v35.56,35.69 35.56,35.94 34.92,36.58 34.92,37.72 33.66,38.99 33.66,41.27 v33.4,41.53
  Bottom 0.254: LCD.15 22.66,8.53 | 22.66,8.53 22.66,8.71 22.61,8.76 22.61,8.58 22.66,8.53
  Bottom 0.508: 35.56,30.61 36.58,29.59 36.58,24.47 22.61,10.5 22.61,8.76 | v33.4,41.53 32.38,42.55
  Bottom 0.762: LCD_LIME.25 LCD_LIME2.25 32.38,42.55
  Bottom 1.016: 35.56,30.61 LCD_CON.25 v35.56,35.69
LVDS0_VPC  (via drill 0.5, 0.6)
  Top 0.508: v38.1,35.69 38.1,35.81 37.47,36.45 37.47,37.85 35.69,39.62 35.69,41.66 v35.56,41.78
  Bottom 0.254: LCD.18 24.16,8.56 | 24.16,8.56 24.16,8.73 24,8.89 24,8.71 24.16,8.56
  Bottom 0.508: 38.1,30.61 39.12,29.59 39.12,24.51 24,9.4 24,8.89 | v35.56,41.78 35.31,42.04 34.29,42.04 33.66,42.67
  Bottom 0.762: LCD_LIME.27 LCD_LIME2.27 33.66,42.67
  Bottom 1.016: 38.1,30.61 LCD_CON.27 v38.1,35.69
N$1
  Bottom 0.762: 41.91,7.37 42.04,7.24 3.3V/5.0V.3
  Bottom 1.27: FET1.3 41.27,8 41.91,7.37
N$2
  Bottom 0.508: LED_E.1 37.08,8.76
  Bottom 0.762: FET4.2 36.76,11.62 37.08,11.3 37.08,10.67 | 37.08,10.67 JACK/10V_DC.2 | 37.08,8.76 37.08,10.67
  Bottom 1.016: FET4.2 36.7,12.34 R14.1
N$3
  Bottom 0.254: LCD.38 34.16,8.38 34.66,8.88 | LCD.40 35.16,8.65 34.8,9.02 34.66,8.88 | LCD.39 34.66,8.88
  Bottom 0.508: 36.07,8.64 LED_E.2
  Bottom 0.762: 35.43,9.27 36.07,8.64
  Bottom 1.016: 34.8,9.02 35.18,9.02 35.43,9.27 35.81,9.65 FET4.3
N$4
  Bottom 0.508: 32.77,15.75 BKL_E.1
  Bottom 1.016: 32.77,15.75 31.62,14.61 R12.2 31.62,12.42 FET3.1
N$5  (via drill 0.5, 0.6)
  Top 0.254: v19.68,48.36 19.68,46.86 16.89,44.07 16.89,40.39 14.35,37.85 13.46,37.85 12.7,37.08 v12.7,35.56
  Bottom 0.508: LCD_LIME.7 20.95,47.62 20.22,48.36 v19.68,48.36
  Bottom 0.762: LCD_LIME.7 LCD_LIME2.7
  Bottom 1.016: LCD_CON.7 v12.7,35.56
N$6  (via drill 0.6)
  Top 0.254: v21.97,48.13 21.97,46.86 19.68,44.58 19.68,40.01 v15.24,35.56
  Bottom 0.762: LCD_LIME2.9 LCD_LIME.9 22.23,47.88 v21.97,48.13
  Bottom 1.016: LCD_CON.9 v15.24,35.56
N$7  (via drill 0.6)
  Top 0.254: v20.32,35.56 20.32,35.94 21.72,37.34 21.72,43.69 25.53,47.5 v25.53,48.39
  Bottom 0.762: LCD_LIME2.13 LCD_LIME.13 24.77,47.62 v25.53,48.39
  Bottom 1.016: LCD_CON.13 v20.32,35.56
N$8
  Bottom 1.016: D1.1 40.19,17.53 41.59,16.13 42.67,16.13 44.32,14.48 R4.1 C4.2 44.45,11.32 FET2.1
N$9
  Bottom 1.016: FET1.1 40.33,11.62 40.01,11.94 C3.2 R3.1 40.01,15.37 38.29,17.08 D1.2
N$10  (via drill 0.6)
  Top 0.254: v45.72,35.69 44.83,36.58 44.32,36.58 39.75,41.15 39.75,42.67 38.1,44.32 38.1,47.62 v37.59,48.13
  Bottom 0.762: LCD_LIME2.33 37.47,44.2 37.72,44.45 37.72,45.72 37.47,45.97 LCD_LIME.33 37.47,48.01 v37.59,48.13
  Bottom 1.016: LCD_CON.33 v45.72,35.69
N$11
  Bottom 1.016: T1.3 R5.1
N$12  (via drill 0.6)
  Top 0.254: v40.13,45.09 40.26,44.96 40.26,44.45 48.01,36.7 49.78,36.7 v50.8,35.69
  Bottom 0.762: LCD_LIME2.37 40.01,45.21 | 40.01,45.21 v40.13,45.09 | 40.01,45.21 LCD_LIME.37
  Bottom 1.016: v50.8,35.69 LCD_CON.37
N$13
  Bottom 0.254: 41.91,42.93 46.61,42.93 53.34,36.2
  Bottom 0.762: 41.91,42.93 41.27,42.93 LCD_LIME2.39 LCD_LIME.39
  Bottom 1.016: 53.34,36.2 LCD_CON.39
N$14  (via drill 0.6)
  Top 0.254: v13.84,36.96 14.61,36.96 18.67,41.02 18.67,45.09 20.57,46.99 20.57,49.28 v20.83,49.53
  Bottom 0.254: 20.95,38.35 20.57,37.97 14.86,37.97 v13.84,36.96 12.7,36.96 11.43,35.69 11.43,30.35 12.7,29.08
  Bottom 0.762: 20.95,38.35 LCD_LIME2.8 | v20.83,49.53 20.95,49.66 LCD_LIME.8
  Bottom 1.016: LCD_CON.8 12.7,29.08
N$15  (via drill 0.6)
  Top 0.254: v13.97,35.56 19.18,40.77 19.18,44.83 21.08,46.74 21.08,48.51 22.1,49.53 v22.23,49.53
  Bottom 0.254: 22.23,38.35 21.34,37.47 15.88,37.47 v13.97,35.56 13.97,30.35 15.24,29.08
  Bottom 0.762: 22.23,38.35 LCD_LIME2.10 | v22.23,49.53 LCD_LIME.10
  Bottom 1.016: LCD_CON.10 15.24,29.08
N$16  (via drill 0.6)
  Top 1.016: v45.21,3.43 45.21,4.19 46.1,5.08 46.1,14.48 v44.2,16.38
  Bottom 1.016: v44.2,16.38 44.2,17.64 T1.1 | EN/CTRL.2 v45.21,3.43
N$17  (via drill 0.6)
  Top 0.254: v19.05,35.56 21.21,37.72 21.21,43.81 24.64,47.24 24.64,49.4 v24.77,49.53
  Bottom 0.254: 24.77,38.35 22.86,36.45 19.94,36.45 v19.05,35.56 19.05,30.35 20.32,29.08
  Bottom 0.762: 24.77,38.35 LCD_LIME2.14 | v24.77,49.53 LCD_LIME.14
  Bottom 1.016: LCD_CON.14 20.32,29.08
N$18  (via drill 0.6)
  Top 0.254: v44.45,35.69 39.24,40.89 39.24,42.42 37.59,44.07 37.59,45.47 36.58,46.48 36.58,48.39 37.47,49.28 v37.47,49.4
  Bottom 0.254: 45.72,29.21 44.45,30.48 v44.45,35.69 43.18,36.96 39.62,36.96 38.99,37.59 38.35,37.59 37.47,38.48
  Bottom 0.762: v37.47,49.4 LCD_LIME.34 | 37.47,38.48 LCD_LIME2.34
  Bottom 1.016: LCD_CON.34 45.72,29.21
N$19
  Bottom 1.016: D1.3 39.41,20.07 39.75,20.07 41.27,21.59 R5.2
N$20  (via drill 0.6, 0.9)
  Top 1.016: v49.4,21.46 49.4,21.59 v49.4,22.48
  Top 1.27: 49.4,21.59 49.4,28.96 45.09,33.27 7.62,33.27 7.24,33.66 | v6.22,34.67 7.24,33.66 | v6.22,34.67 v6.22,33.66 7.24,33.66 | 13.72,44.2 16,46.48 v16,46.74 | 13.72,44.2 v13.72,43.43 | v6.22,34.67 6.22,36.7 13.72,44.2
  Bottom 0.508: 16.76,43.43 LCD_LIME2.1 | 16.76,46.74 LCD_LIME.1
  Bottom 1.016: 5.08,33.66 5.08,34.67 v6.22,34.67 v6.22,33.66 5.08,33.66 | LCD_CON.1 5.08,33.66 | v49.4,21.46 49.4,21.97 | 49.4,21.97 49.02,21.97 | v49.4,22.48 49.4,21.97
  Bottom 1.27: v16,46.74 16.76,46.74 | v13.72,43.43 16.76,43.43
  Bottom 1.778: 49.02,21.97 PWR_JACK/5V_LCD_CON.3
N$21  (via drill 0.6)
  Top 0.254: v41.91,48.77 41.91,44.07 v48.01,37.97
  Bottom 0.254: 50.8,29.21 49.53,30.48 49.53,36.45 v48.01,37.97 40.51,37.97 40.01,38.48 | v41.91,48.77 41.15,49.53 40.51,49.53 40.01,50.04
  Bottom 0.762: 40.01,50.04 LCD_LIME.38 | 40.01,38.48 LCD_LIME2.38
  Bottom 1.016: 50.8,29.21 LCD_CON.38
N$22
  Bottom 1.778: PWR_JACK.1 49.91,14.1 49.91,15.49 50.29,15.11 | PWR_JACK/5V_LCD_CON.1 48.51,16.89 50.29,15.11 | 50.29,15.11 51.05,14.35
N$23  (via drill 0.6)
  Top 0.254: v49.02,38.86 47.88,38.86 42.8,43.94 v42.8,50.29
  Bottom 0.254: 53.34,29.21 52.07,30.48 52.07,35.81 v49.02,38.86 41.91,38.86
  Bottom 0.508: LCD_LIME2.40 41.27,38.86 41.53,38.86
  Bottom 0.762: v42.8,50.29 41.27,50.29 LCD_LIME.40 | 41.53,38.86 41.91,38.86
  Bottom 1.016: 53.34,29.21 LCD_CON.40
N$24  (via drill 0.6)
  Bottom 0.508: U1.5 3.94,10.41 3.94,10.16 3.94,9.65 3.94,9.46 U1.4
  Bottom 0.813: C7.1 2.92,10.16
  Bottom 1.016: L1.2 2.92,16.59 C8.1 2.92,10.16 3.94,10.16 | 2.92,8.38 v3.3,8.38 3.94,8.38 | 2.92,8.38 v2.41,8.38 v2.41,7.37 3.05,7.37 | 2.92,8.38 C7.1 3.94,9.65 3.94,8.38 | 3.94,8.38 v4.45,8.38 v4.45,7.37 v3.43,7.37 3.05,7.37 | 3.05,7.37 R6.1 3.05,4.7
  other vias: 1.02,20.83 2.16,20.83 3.3,20.83
  pour Top (isolate 0.305): 3.94,22.23 0.51,22.23 0.51,6.73 4.95,6.73 4.95,9.02 3.94,9.02
  pour Bottom (isolate 0.305, no thermals): 0.51,22.23 4.06,22.23 4.06,13.59 0.51,13.59
N$25
  Bottom 0.762: R8.1 36.2,15.49 34.92,14.22 R14.2
  Bottom 1.016: FET4.1 34.92,12.34 R14.2
N$26
  Bottom 0.254: FET3.3 29.13,13.38 33.4,17.65 36.07,17.65 R8.2
N$123  (via drill 0.6)
  Bottom 0.508: U1.1 7.49,11.36 7.49,12.45
  Bottom 1.778: 7.49,12.45 7.49,16.33 L1.1 8.43,19.81 12.32,19.81 D2.2
  other vias: 6.22,11.56 6.22,12.57 8.51,12.83 8.51,13.84 7.11,20.83 8.26,20.83
  pour Top (isolate 0.305, no thermals): 6.6,22.23 6.6,13.34 6.22,12.95 5.84,12.95 5.84,11.05 10.41,11.05 10.41,22.23
  pour Bottom (isolate 0.305, no thermals): 10.54,21.84 10.54,21.08 14.35,21.08 14.35,17.14 10.54,17.14 10.54,11.18 5.84,11.18 5.84,13.08 6.35,13.08 6.6,13.34 6.6,21.84
N$126
  Bottom 0.508: U1.3 7.24,9.46 7.24,9.02 7.34,9.02 7.72,9.4
  Bottom 1.016: R11.1 R10.1 7.24,9.02
RXE0+  (via drill 0.5, 0.6)
  Top 0.508: v25.93,9.77 25.65,10.05 25.65,16.89 23.5,19.05 23.5,19.68 23.75,19.94 v23.75,20.07 | v22.86,35.56 22.86,36.04 24,37.19 24,43.31 v26.04,45.34
  Bottom 0.254: LCD.21 25.66,8.41 26.01,8.76
  Bottom 0.508: 26.01,8.76 26.01,9.69 v25.93,9.77 | v23.75,20.07 23.75,20.32 23.5,20.57 23.5,23.89 23.88,24.27 23.88,29.08 22.86,30.1
  Bottom 0.762: LCD_LIME.15 v26.04,45.34 LCD_LIME2.15
  Bottom 1.016: 22.86,30.1 LCD_CON.15 v22.86,35.56
RXE0-  (via drill 0.5, 0.6)
  Top 0.508: v25.09,9.02 25.02,9.09 25.02,16.62 22.86,18.78 22.86,19.68 22.61,19.94 v22.61,20.07 | v21.59,35.56 21.59,35.69 23.37,37.47 23.37,41.27 | v26.04,49.53 26.54,49.02 26.54,47.14 23.37,43.97 23.37,41.27 | 23.37,41.27 v22.99,41.27
  Bottom 0.254: LCD.20 25.16,8.64 25.15,8.64
  Bottom 0.508: v25.09,9.02 25.15,9.02 25.15,8.64 | v22.61,20.07 22.61,20.32 22.86,20.57 22.86,24.51 | 22.86,28.57 21.84,29.59 21.84,35.31 v21.59,35.56 | v22.99,41.27 23.24,41.27 23.62,40.89 25.4,40.89 26.04,40.26
  Bottom 0.762: 26.04,40.26 LCD_LIME2.16 | v26.04,49.53 LCD_LIME.16
  Bottom 1.016: 22.86,24.51 LCD_CON.16 22.86,28.57
RXE1+  (via drill 0.5, 0.6)
  Top 0.508: v27.81,10.29 27.81,10.92 27.18,11.56 27.18,19.56 26.04,20.7 26.04,21.72 26.29,21.97 v26.29,22.1 | v25.78,35.94 25.53,36.2 25.53,41.4 v25.91,41.78
  Bottom 0.254: LCD.24 27.16,8.5 27.3,8.65
  Bottom 0.508: 27.3,8.65 27.56,8.9 27.56,10.03 v27.81,10.29 | v26.29,22.1 26.16,22.23 26.16,22.48 26.04,22.61 26.04,23.89 26.42,24.27 26.42,29.21 25.4,30.23 | v25.91,41.78 26.54,41.78 27.3,42.55
  Bottom 0.762: LCD_LIME.17 LCD_LIME2.17 27.3,42.55
  Bottom 1.016: 25.4,30.23 LCD_CON.17 25.4,34.92 25.78,35.31 v25.78,35.94
RXE1-  (via drill 0.5, 0.6)
  Top 0.508: v26.8,10.67 26.54,10.92 26.54,19.28 25.4,20.42 25.4,21.72 25.15,21.97 v25.15,22.1 | v24.51,36.07 24.89,36.45 24.89,42.8 27.05,44.96 27.05,46.23 27.56,46.74 v27.56,48.39
  Bottom 0.254: LCD.23 26.66,8.73 | 26.66,8.73 26.8,8.87 26.8,9.02 | 26.79,9.03 26.8,9.03 26.8,9.02 | 26.66,8.73 26.66,9.02 26.8,9.02
  Bottom 0.508: 26.79,9.03 26.92,9.17 26.92,10.54 v26.8,10.67 | v25.15,22.1 25.15,22.35 25.4,22.61 25.4,24.51 | 25.4,28.7 24.38,29.72 24.38,35.94 v24.51,36.07 25.53,37.08 25.91,37.08 27.3,38.48 | v27.56,48.39 27.3,48.64 27.3,49.78
  Bottom 0.762: 27.3,38.48 LCD_LIME2.18 | 27.3,49.78 LCD_LIME.18
  Bottom 1.016: 25.4,24.51 LCD_CON.18 25.4,28.7
RXE2+  (via drill 0.5, 0.6)
  Top 0.508: v29.59,9.02 29.59,9.65 29.34,9.91 29.34,11.81 28.7,12.45 28.7,23.62 v28.96,23.88 | v27.94,35.69 27.94,37.08 27.56,37.47 27.56,43.28 28.57,44.3 28.57,44.7 v28.96,45.09
  Bottom 0.254: LCD.27 28.66,8.29 | 28.66,8.29 28.66,8.47 28.83,8.64 28.96,8.64 28.96,8.58 28.66,8.29
  Bottom 0.508: 28.96,8.64 29.34,9.02 v29.59,9.02 | 27.94,30.35 28.96,29.34 v28.96,23.88
  Bottom 0.762: 28.57,45.09 LCD_LIME.19 | v28.96,45.09 28.57,45.09 | 28.57,45.09 LCD_LIME2.19
  Bottom 1.016: 27.94,30.35 LCD_CON.19 v27.94,35.69
RXE2-  (via drill 0.5, 0.6)
  Top 0.508: v28.55,9.5 28.7,9.65 28.7,11.53 28.07,12.17 28.07,23.62 v27.81,23.88 | v26.92,36.58 26.92,43.56 27.94,44.58 27.94,45.47 28.57,46.1 v28.57,49.4
  Bottom 0.254: 28.16,8.6 28.16,8.86 28.32,9.02 28.32,8.76 28.16,8.6 | LCD.26 28.16,8.6
  Bottom 0.508: 28.32,9.02 28.32,9.27 v28.55,9.5 | 27.94,28.83 26.92,29.84 v26.92,36.58 28.57,38.23
  Bottom 0.762: v27.81,23.88 27.94,24 LCD_CON.20 | 28.57,38.23 LCD_LIME2.20 | v28.57,49.4 LCD_LIME.20
  Bottom 1.016: LCD_CON.20 27.94,28.83
RXEC+  (via drill 0.5, 0.6)
  Top 0.508: v30.25,6.1 30,6.35 28.96,6.35 27.81,5.21 25.65,5.21 24.13,6.73 24.13,14.49 21.08,17.54 21.08,18.17 21.34,18.43 v21.34,18.54 | v10.16,35.56 10.16,36.3 12.34,38.48 13.74,38.48 15.62,40.36 15.62,41.27 v16,41.66
  Bottom 0.254: LCD.30 30.16,6.19 v30.25,6.1 | v16,41.66 16.51,42.16 19.3,42.16 19.68,42.55
  Bottom 0.508: 10.16,30.48 11.18,29.46 11.18,24.62 11.8,24 20.19,24 21.08,23.11 21.08,19.05 21.34,18.8 v21.34,18.54
  Bottom 0.762: LCD_LIME.5 LCD_LIME2.5 19.68,42.55
  Bottom 1.016: 10.16,30.48 LCD_CON.5 v10.16,35.56
RXEC-  (via drill 0.5, 0.6)
  Top 0.508: v29.34,5.44 29.31,5.46 29.08,5.46 28.19,4.57 25.39,4.57 23.5,6.46 23.5,14.22 20.45,17.27 20.45,18.16 20.19,18.41 v20.19,18.54 | v19.56,49.53 19.3,49.53 18.67,48.9 18.67,46.74 14.99,43.05 14.99,40.77 | v8.89,35.56 8.89,35.94 12.06,39.12 13.46,39.12 14.99,40.64 14.99,40.77 | 14.99,40.77 v14.61,40.77
  Bottom 0.254: 29.34,6.3 29.66,6.62 29.66,6.69 | 29.66,6.69 LCD.29 | 29.66,6.69 29.34,6.37 29.34,6.22 | 19.68,40.26 19.3,40.64 14.73,40.64 v14.61,40.77
  Bottom 0.508: v29.34,5.44 29.34,6.22 29.34,6.3 | 10.16,24.74 11.53,23.37 19.93,23.37 20.45,22.85 20.45,19.05 20.19,18.8 v20.19,18.54 | 10.16,28.96 9.14,29.97 9.14,35.31 v8.89,35.56
  Bottom 0.762: 19.68,40.26 LCD_LIME2.6 | v19.56,49.53 19.68,49.66 LCD_LIME.6
  Bottom 1.016: 10.16,24.74 LCD_CON.6 10.16,28.96
VCC  (via drill 0.6, 0.8)
  Top 1.27: 32.13,2.92 35.56,2.92 41.66,9.02 v44.2,9.02 | 32.13,2.92 32.13,7.87 31.75,8.26 31.75,9.78 34.54,12.57 v34.54,16.51 | v19.56,14.99 19.56,7.87 24.51,2.92 32.13,2.92
  Bottom 0.254: LCD.2 16.16,8.79 16.26,8.89 | LCD.3 16.66,8.74 16.51,8.89 | LCD.4 17.16,8.37 16.64,8.89
  Bottom 0.508: 34.04,16 BKL_E.2 | 44.58,7.24 3.3V/5.0V.1
  Bottom 1.016: v34.54,16.51 34.04,16 | 16.64,8.89 16.51,8.89 16.26,8.89 15.49,8.89 C2.1 C1.1 15.11,11.94 16.26,13.08 R7.1 R9.1 18.16,14.99 | R2.1 R1.2 18.16,16 18.16,14.99 | FET2.3 45.3,9.02 44.58,9.02 44.58,7.24 | 18.16,14.99 v19.56,14.99
  Bottom 1.27: 44.58,9.02 v44.2,9.02 v43.31,9.02
VLED_EN  (via drill 0.5, 0.6)
  Top 0.254: v18.92,3.68 17.78,4.83 17.27,4.83 15.75,6.35 15.75,10.67 17.14,12.06 v17.14,20.19 17.27,20.32 17.27,22.61 19.05,24.38 v19.05,25.27 | v23.75,48.26 23.75,47.12 20.7,44.07 20.7,38.48 v17.78,35.56
  Bottom 0.254: LCD.36 33.16,6.36 30.86,4.06 19.3,4.06 v18.92,3.68
  Bottom 0.508: v19.05,25.27 19.05,29.29 17.78,30.56
  Bottom 0.762: LCD_LIME2.11 LCD_LIME.11 23.5,48.01 v23.75,48.26
  Bottom 1.016: 17.78,30.56 LCD_CON.11 v17.78,35.56 | v17.14,20.19 17.14,19.05 R1.1
VPWM_EN  (via drill 0.6)
  Top 0.254: v17.4,3.94 17.27,3.94 15.24,5.97 15.24,10.92 15.88,11.56 v15.88,20.19 16.64,20.95 v16.64,25.27 | v23.5,49.53 22.86,48.9 22.86,46.99 20.19,44.32 20.19,39.24 v16.51,35.56
  Bottom 0.254: LCD.35 32.66,6.62 30.61,4.57 18.03,4.57 v17.4,3.94 | 17.78,29.08 16.51,30.35 v16.51,35.56 17.91,36.96 22.1,36.96 23.5,38.35
  Bottom 0.762: 23.5,38.35 LCD_LIME2.12 | v23.5,49.53 LCD_LIME.12
  Bottom 1.016: v16.64,25.27 17.78,25.27 LCD_CON.12 17.78,29.08 | v15.88,20.19 15.49,19.81 R2.2

## Text on the board
Top: Platkata trqbva da e debela 1mm!!!
Bottom: 56 errors
tNames: Platkata trqbva da e debela 1mm!!!
bNames: 39 | 1 | 2 | 5V_LCD_CON | https://www.olimex.com | PWR_JACK | LCD-OLinuXino-15.6FHD | Rev.E | 5V only | (C) 2014 | 10V_DC | JACK | PWR | JACK